# Altium PCB SirenControllerPCB.PcbDoc
Units mil, origin at the board's own origin, x right, y up, seen from the top; angles counter-clockwise.
Board outline 2760 x 2470 mil, 2 copper layers (Top Layer, Bottom Layer); 32 components, 19 nets, 145 pads, 17 vias.
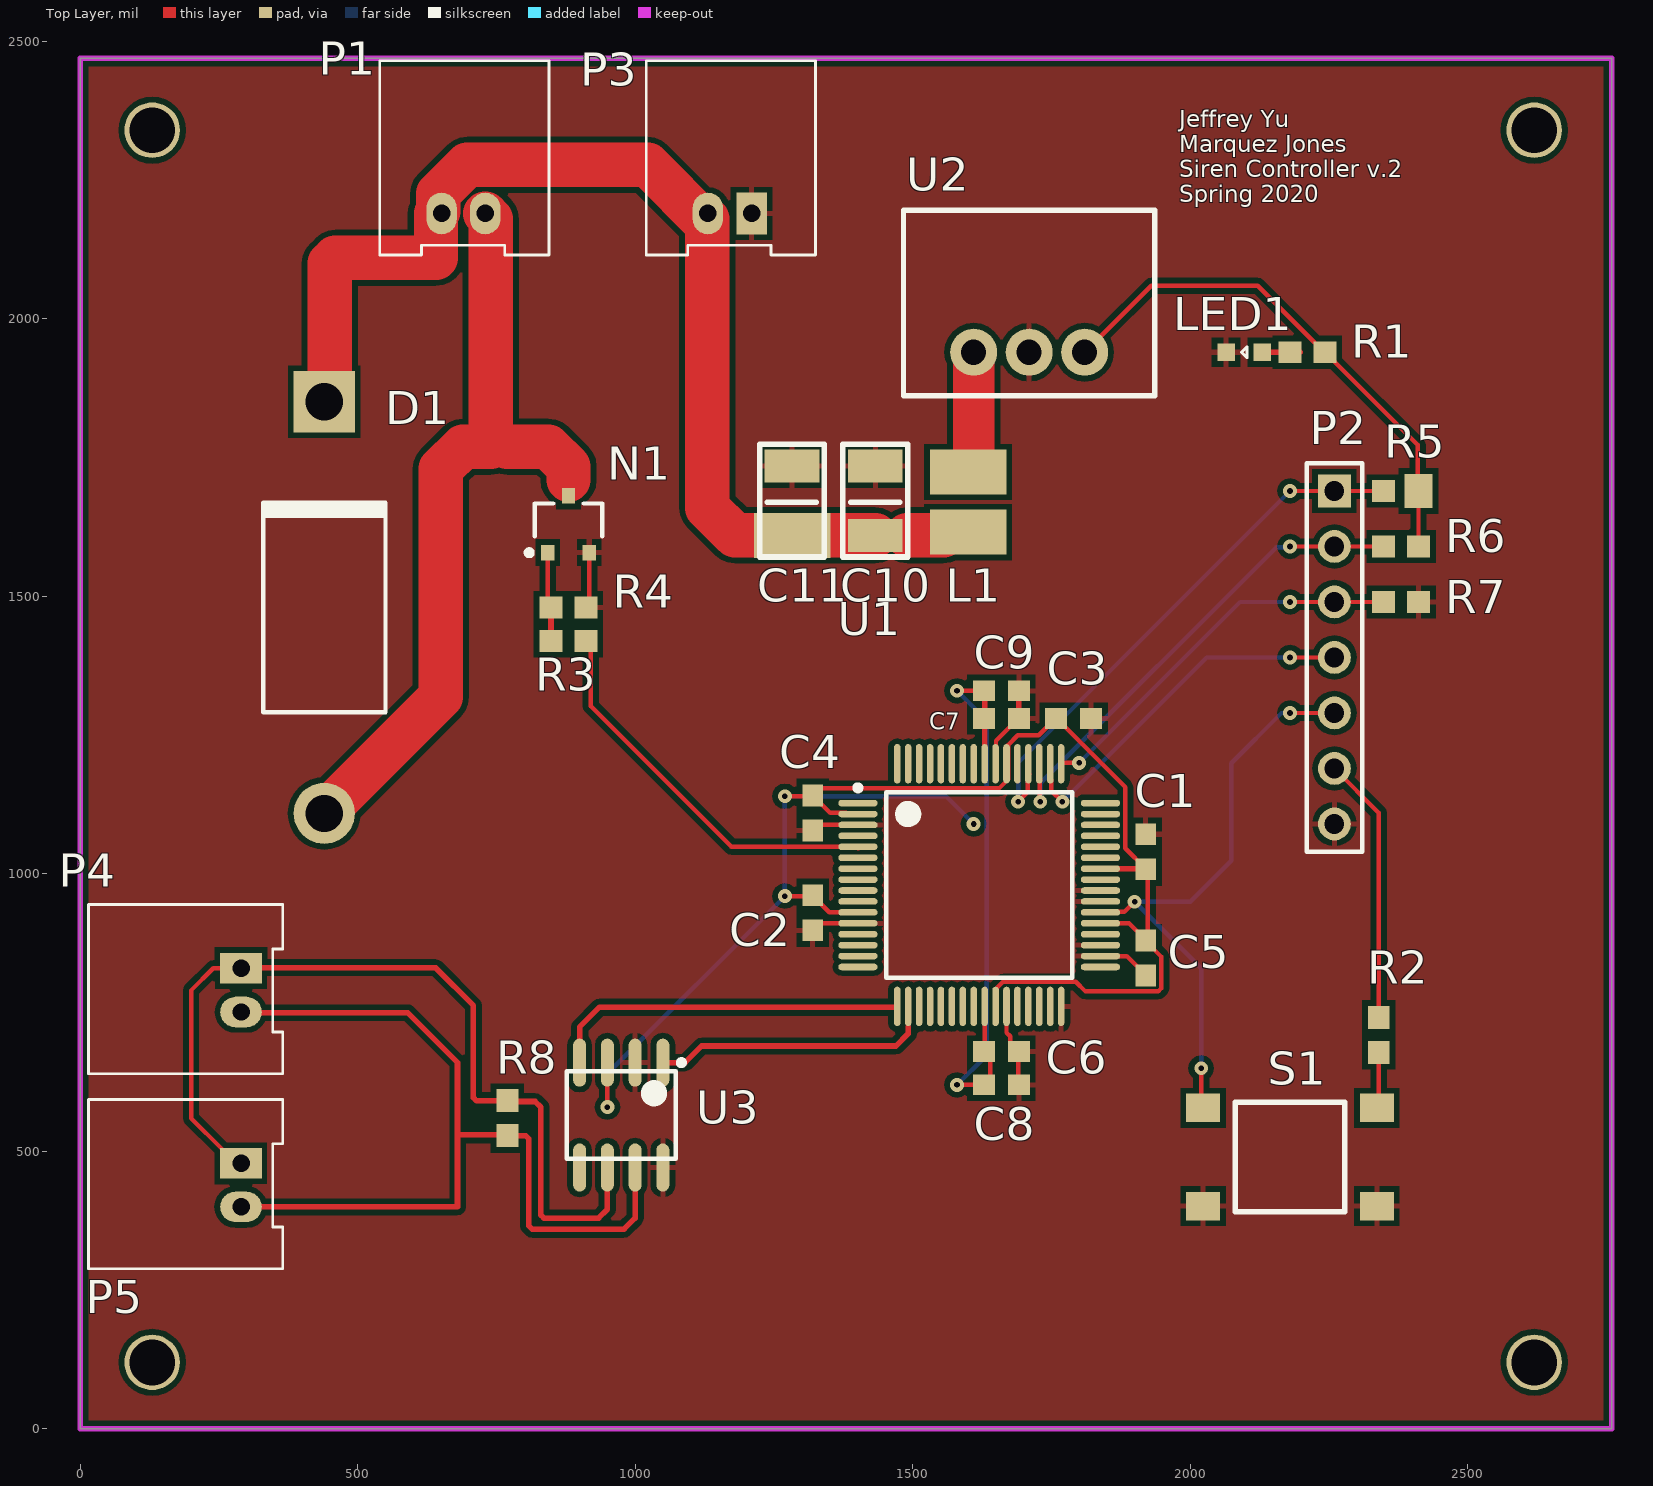
[diagram p0: Top Layer view]
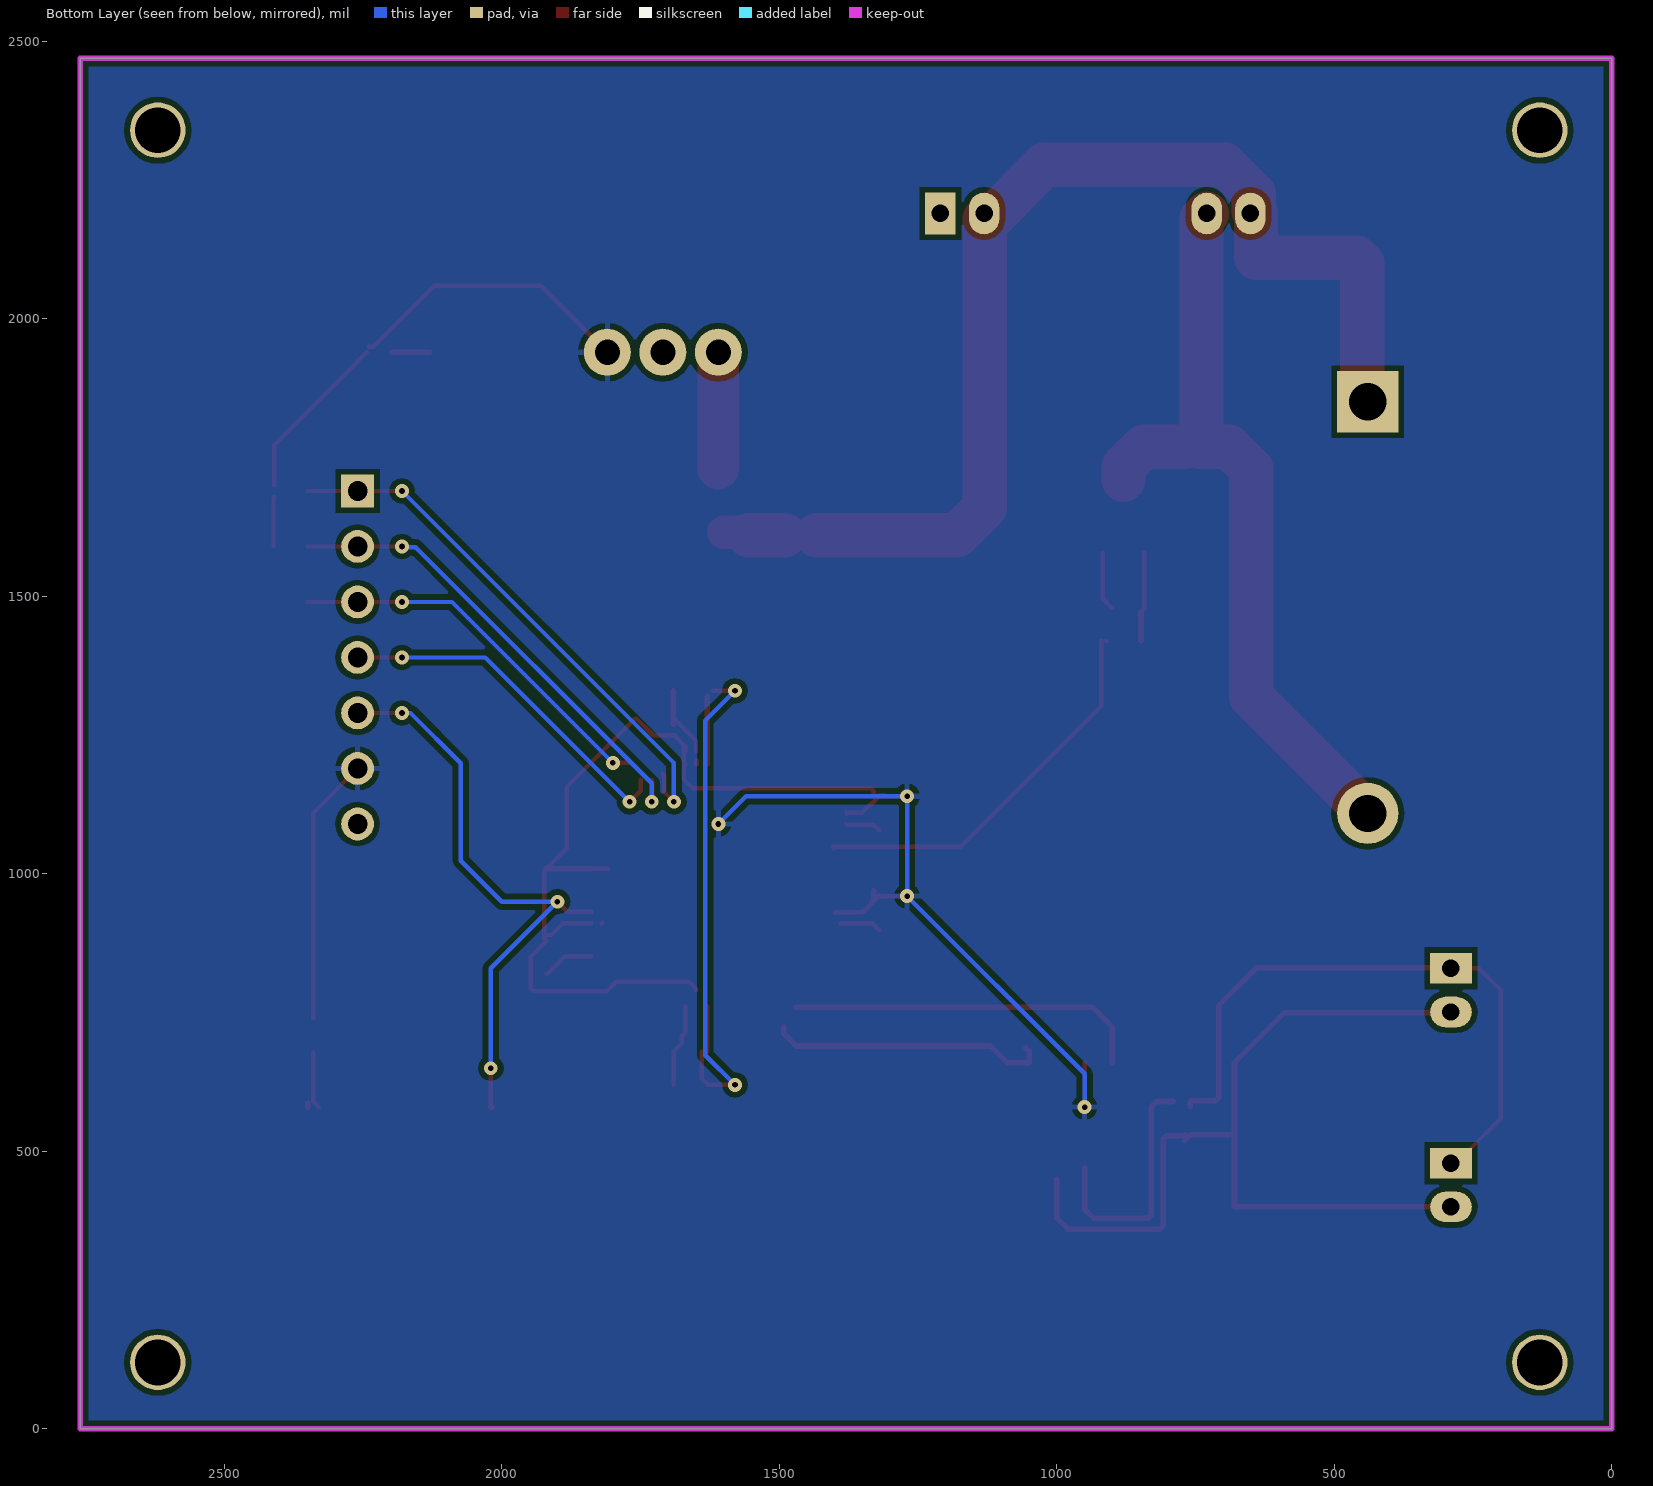
[diagram p1: Bottom Layer view, seen from below]

## Layer stack, top to bottom
Top Solder: solder mask 0.4, Solder Resist, Dk 3.5
Top Layer: signal copper 1.4
Dielectric 1: dielectric 12.6, FR-4, Dk 4.8
Bottom Layer: signal copper 1.4
Bottom Solder: solder mask 0.4, Solder Resist, Dk 3.5

## Board outline
0,0 0,2470 2760,2470 2760,0
cut-out: 2035,835

## Design rules (kind name [scope] priority, off if disabled: settings)
Clearance [All] p1: gap=10 ignorepadtopadclearanceinfootprint=FALSE except(0: Arc-Hole Track-Hole SMDPad-Hole THPad-Hole Via-Hole Fill-Hole Poly-Hole Region-Hole Text-Hole; 5: Track-Track Track-SMDPad SMDPad-SMDPad; 7: Track-Via)
HoleSize [All] p1: absolutevalues=TRUE maxlimit=150 minlimit=10 maxpercent=80.000 minpercent=20.000
MinimumAnnularRing [All] p1: minimumring=7
MinimumSolderMaskSliver [All] p1: minsoldermaskwidth=1
PolygonConnect [All] p1: connectstyle=Relief reliefconductorwidth=10 reliefentries=4 polygonreliefangle="90 Angle" airgapwidth=10
RoutingVias [All] p1: holewidth=10 width=22 viastyle="Through Hole" minholewidth=10 minwidth=22 maxholewidth=100 maxwidth=150
SilkToSolderMaskClearance [IsPad] p1: minsilkscreentomaskgap=5 clearancetoexposedcopper=TRUE
SolderMaskExpansion [All] p1: expansion=4
Width [All] p1: maxlimit=150 minlimit=8 preferedwidth=10
27 further rules are at their usual default settings.

## Classes and differential pairs
component class SirenSchematic: C1 C2 C3 C4 C5 C10 C11 D1 L1 LED1 N1 P2 P3 P4 P5 R1 R2 R3 R4 R5 R6 R7 R8 S1 U1 U2 U3

## Components (designator, comment, footprint, x,y, rotation, side; value= is the part's Value field where it differs from the comment)
C1 "Cap" CAPC0603 1920,1040 r90 top value=0.1uF
C2 "Cap" CAPC0603 1320,930 r270 top value=0.1uF
C3 "Cap" CAPC0603 1790,1280 r0 top value=0.1uF
C4 "Cap" CAPC0603 1320,1110 r270 top value=0.1uF
C5 "Cap" CAPC0603 1920,848.5 r270 top value=2.0uF
C6 "Cap" CAPC0603 1660,680 r0 top value=0.1uF
C7 "Cap" CAPC0603 1660,1280 r0 top value=0.1uF
C8 "Cap" CAPC0603 1660,620 r0 top value=1.0uF
C9 "Cap" CAPC0603 1660,1330 r0 top value=2.2uF
C10 "CAP1210" CAP1210#1 1432.76,1609.21 r270 top value=10uF
C11 "CAP1210" CAP1210#2 1282.76,1609.21 r270 top value=10uF
D1 "Diode 1N5400" DO-201AD 440,1480 r90 top
L1 "RLS-567" *IND_RLS-567 1600,1670 r90 top
LED1 "LED" LED0603 2097.52,1940 r180 top
N1 "SSM3K329R,LF" SSM3K329R,LF 880,1630 r90 top
P1 "2-pin Horz Sherlock" MOLEX-HDR-1X2-SHERLOCK-HORZ#1 730,2190 r0 top
P2 "Header 7" HDR1X7 2260,1690 r270 top
P3 "2-pin Horz Sherlock" MOLEX-HDR-1X2-SHERLOCK-HORZ#2 1210,2190 r0 top
P4 "2-pin Horz Sherlock" MOLEX-HDR-1X2-SHERLOCK-HORZ#2 290,830 r90 top
P5 "2-pin Horz Sherlock" MOLEX-HDR-1X2-SHERLOCK-HORZ#2 290,478.74 r90 top
R1 "Res" RES0603#1 2211.5,1940 r180 top value=1k
R2 "Res" RES0603#1 2340,710 r270 top value=10k
R3 "Res" RES0603#1 880,1420 r0 top value=100
R4 "Res" RES0603#1 880,1480 r0 top value=10k
R5 "Res" RES0603#2 2380,1690 r180 top value=10k
R6 "Res" RES0603#1 2380,1590 r180 top value=10k
R7 "Res" RES0603#1 2380,1490 r0 top value=10k
R8 "Res" RES0603#1 770,560 r270 top value=120
S1 "Button" PTS645xxxxSMTR92 2180,490 r0 top
U1 "TM4C123GH6PMT7R" PM0064A_N 1620,980 r0 top locked value=Value
U2 "R-78C3.3-1.0" R-78C3.3-1.0 1610,1940 r0 top
U3 "SN65HVD230DR" SOIC-8pin 975,565.51 r270 top

## Footprints (in the part's own frame and the unit in brackets; to place one, negate y for a bottom-side part, rotate by r counter-clockwise, add the part's x,y. Pads: shape width x height; smd on the part's side, far side on the other; paste and mask are expansions set on the pad)
*IND_RLS-567 [mm]
  rect 2.05x3.5 smd: 1(-1.375,0) 2(1.375,0)
CAP1210#1 [mm]
  rect 1.5x2.5 smd: 1(-0.02,0) 2(-3.2,0)
  silkscreen extent -4.2,-1.48 0.97,1.48, body extent -3.22,-1.25 0,1.26, height 2.5
CAP1210#2 [mm]
  rect 2.05x3.5 smd: 1(-0.02,0)
  rect 1.5x2.5 smd: 2(-3.2,0)
  silkscreen extent -4.2,-1.48 0.97,1.48, body extent -3.22,-1.25 0,1.26, height 2.5
CAPC0603 [mm] "Chip Capacitor, 2-Leads, Body 1.60x0.80mm, IPC Medium Density"
  rect 1x0.95 smd: 1(-0.8,0) 2(0.8,0)
  body extent -0.88,-0.48 0.87,0.48, height 0.8
DO-201AD [mm] "Diode, Axial; Body 9.5 x 5.6 mm (LxDia. max), Lead Dia. 1.32 mm (max)"
  round 2.8 hole 1.7: 1(-9.42,0)
  rect 2.8x2.8 hole 1.7: 2(9.42,0)
  silkscreen extent -4.8,-2.8 4.9,2.8
HDR1X7 [mm] "Connector; Header; 7 Position"
  rect 1.5x1.5 hole 0.9: 1(0,0)
  round 1.5 hole 0.9: 2(2.54,0) 3(5.08,0) 4(7.62,0) 5(10.16,0) 6(12.7,0) 7(15.24,0)
  silkscreen extent -1.27,-1.27 16.51,1.27
LED0603 [mm] "Chip LED, 2-Leads, Body 1.60x0.80mm, IPC Medium Density"
  rect 0.8x0.8 smd: A(-0.825,0) C(0.825,0)
  silkscreen extent -0.13,-0.25 0.12,0.25, body extent -0.88,-0.48 0.87,0.47, height 0.8
MOLEX-HDR-1X2-SHERLOCK-HORZ#1 [mm]
  oval 1.397x1.905 hole 0.8: 1(0,0) 2(-2,0)
  silkscreen extent -4.83,-1.91 2.92,6.98, body extent -4.83,-1.91 2.87,8.59, height 5.54
MOLEX-HDR-1X2-SHERLOCK-HORZ#2 [mm]
  rect 1.397x1.905 hole 0.8: 1(0,0)
  oval 1.397x1.905 hole 0.8: 2(-2,0)
  silkscreen extent -4.83,-1.91 2.92,6.98, body extent -4.83,-1.91 2.87,8.59, height 5.54
PM0064A_N [mm]
  oval 1.8x0.3 smd paste-0.102 mask+0.051: 1(-5.55,3.75) 2(-5.55,3.25) 3(-5.55,2.75) 4(-5.55,2.25) 5(-5.55,1.75) 6(-5.55,1.25) 7(-5.55,0.75) 8(-5.55,0.25) 9(-5.55,-0.25) 10(-5.55,-0.75) 11(-5.55,-1.25) 12(-5.55,-1.75) 13(-5.55,-2.25) 14(-5.55,-2.75) 15(-5.55,-3.25) 16(-5.55,-3.75) 33(5.55,-3.75) 34(5.55,-3.25) 35(5.55,-2.75) 36(5.55,-2.25) 37(5.55,-1.75) 38(5.55,-1.25) 39(5.55,-0.75) 40(5.55,-0.25) 41(5.55,0.25) 42(5.55,0.75) 43(5.55,1.25) 44(5.55,1.75) 45(5.55,2.25) 46(5.55,2.75) 47(5.55,3.25) 48(5.55,3.75)
  oval 0.3x1.8 smd paste-0.102 mask+0.051: 17(-3.75,-5.55) 18(-3.25,-5.55) 19(-2.75,-5.55) 20(-2.25,-5.55) 21(-1.75,-5.55) 22(-1.25,-5.55) 23(-0.75,-5.55) 24(-0.25,-5.55) 25(0.25,-5.55) 26(0.75,-5.55) 27(1.25,-5.55) 28(1.75,-5.55) 29(2.25,-5.55) 30(2.75,-5.55) 31(3.25,-5.55) 32(3.75,-5.55) 49(3.75,5.55) 50(3.25,5.55) 51(2.75,5.55) 52(2.25,5.55) 53(1.75,5.55) 54(1.25,5.55) 55(0.75,5.55) 56(0.25,5.55) 57(-0.25,5.55) 58(-0.75,5.55) 59(-1.25,5.55) 60(-1.75,5.55) 61(-2.25,5.55) 62(-2.75,5.55) 63(-3.25,5.55) 64(-3.75,5.55)
  silkscreen extent -5.67,-4.25 4.25,4.57, body extent -4.19,-4.19 4.19,4.19, height 0.64
PTS645xxxxSMTR92 [mm] "PTS645 Series SMT 6 mm Tactile Switch"
  rect 1.555x1.3 smd: A(-3.975,2.25) A(3.975,2.25) B(-3.975,-2.25) B(3.975,-2.25)
  silkscreen extent -2.5,-2.5 2.5,2.5, body extent -3,-3 3,3, height 4.5
R-78C3.3-1.0 [mm] "CONV DC/DC 1A 3.3V OUT SIP VERT"
  round 2.15 hole 1.15: 1(0,0) 2(2.54,0) 3(5.08,0)
  silkscreen extent -3.21,-2 8.29,6.5, body extent -3.3,-2.03 8.38,6.6, height 10.4
RES0603#1 [mm] "Chip Resistor, 2-Leads, Body 1.60x0.80mm, IPC Medium Density"
  rect 1.05x1 smd: 1(-0.8,0) 2(0.8,0)
  body extent -0.88,-0.48 0.87,0.47, height 0.8
RES0603#2 [mm] "Chip Resistor, 2-Leads, Body 1.60x0.80mm, IPC Medium Density"
  rect 1.3x1.555 smd: 1(-0.8,0)
  rect 1.05x1 smd: 2(0.8,0)
  body extent -0.88,-0.48 0.87,0.47, height 0.8
SOIC-8pin [mm] "For 296-1345-1-ND"
  oval 2.2x0.6 smd: 1(-2.4,1.905) 2(-2.4,0.635) 3(-2.4,-0.635) 4(-2.4,-1.905) 5(2.4,-1.905) 6(2.4,-0.635) 7(2.4,0.635) 8(2.4,1.905)
  silkscreen extent -2.52,-2.5 2,2.88, body extent -2,-2.5 2,2.5, height 1.75
SSM3K329R,LF [mm] "MOSFET N CH 30V 3.5A 2-3Z1A"
  rect 0.7x0.6 smd: 1(-1.3,0.95) 2(-1.3,-0.95) 3(1.3,0)
  silkscreen extent -1.42,-1.55 0.95,1.92, body extent -0.95,-1.55 0.95,1.55, height 0.8

## Part data
C1 C2 C3 C4 C5 C6 C7 C8 C9: Supplier Part Number 1=1276-1000-1-ND, Supplier 1=Digi-Key
C10 C11: "CAP CER 10UF 50V 20% X5R 1210", Supplier Part Number 1=587-2225-1-ND, Supplier 1=Digi-Key
D1: "3 Amp General Purpose Rectifier", ComponentLink1Description="Manufacturer Link", ComponentLink1URL=http://www.fairchildsemi.com/, ComponentLink2Description=Datasheet, ComponentLink2URL=http://www.fairchildsemi.com/ds/1N%2F1N5400.pdf, DatasheetVersion=1998, LatestRevisionDate=17-Jul-2002, LatestRevisionNote="Re-released for DXP Platform.", PackageDescription="Diode, Axial; Body 9.5 x 5.6 mm (LxDia. max), Lead Dia. 1.32 mm (max)", PackageReference=DO-201AD, PackageVersion=Aug-1999, Published=8-Jun-2000, Publisher="Altium Limited"
L1: "Inductor", Manufacturer_Name="RECOM Power", Mouser Part Number=919-RLS-567, Datasheet Link=https://componentsearchengine.com/Datasheets/1/RLS-567.pdf, Height=3.1mm, Manufacturer_Part_Number=RLS-567, Mouser Price/Stock=https://www.mouser.com/Search/Refine.aspx?Keyword=919-RLS-567
LED1: Color=Red, Supplier Part Number 1=754-1122-1-ND, Supplier 1=Digi-Key
N1: "MOSFET N CH 30V 3.5A 2-3Z1A", Manufacturer 1="Toshiba Semiconductor and Storage", Supplier Part Number 1=SSM3K329RLFTR-ND, Manufacturer Part Number 1=SSM3K329R,LF, Supplier 1=Digi-Key
P1 P3 P4 P5: library part MOLEX-HDR-1x2-SHERLOCK_RA, "Header, Molex, 2mm Pitch Sherlock Header, Single Row, Horizontal, 2 Circuits, Length 3.3mm,  0353630260", Manufacturer="Molex Inc", Manufacturer Part Number=0353630260, Supplier Part Number 1=WM18931-ND, Supplier 1=Digi-Key
P2: "Header, 7-Pin", LatestRevisionDate=17-Jul-2002, LatestRevisionNote="Re-released for DXP Platform.", Publisher="Altium Limited"
R1 R2 R3 R4 R5 R6 R7 R8: Supplier Part Number 1=RMCF0603JT10K0CT-ND, Supplier 1=Digi-Key
S1: "SPST Button", Supplier Part Number 1=CKN9087CT-ND, Supplier 1=Digi-Key
U1: "Imported", Alternate_PartNumber=TM4C123GH6PMT, Manufacturer="Texas Instruments", PartNumber=TM4C123GH6PMTR, CompType=IC, MountType=SMT, PackageReference=PM0064A, PIN_COUNT=64, RefDes=RefDes, RoHS=Y, TYPE=TYPE
U2: "CONV DC/DC 1A 3.3V OUT SIP VERT", Supplier Part Number 1=945-1394-5-ND, Supplier 1=Digi-Key
U3: "IC TXRX CAN 1MBPS 3.3V 8SOIC", Supplier Part Numbe 1=296-11654-1-ND, Supplier 1=Digi-Key

## Free pads (board coordinates)
  round 100 hole 82.68: 1(130,120) 1(130,2340) 1(2620,120) 1(2620,2340)

## Via types
v1: diameter 25, hole 10, Top Layer to Bottom Layer, tented both sides, 17 vias

## Nets (pads, with @x,y where several pads share a name; then routed paths per layer and width w, separated by ;. In a path a pad name is that pad's centre, name@x,y a point inside that pad or via, vN(x,y) a via of type N, cw(c..) or ccw(c..) an arc to the next point about the centre after c; other vN are vias at no path point)
24V: C10.1 C11.1 D1.2 L1.1 P1.2 P3.2 | length 2107.6
  Top Layer w8: P1.2 P1.2@651.26,2191.26 ; P3.2@1121.26,2180 1130,2171.26 P3.2@1131.26,2170 ; P3.2@1131.26,2200 P3.2@1140,2200 ; C10.1@1436.38,1606.38 C10.1@1445.87,1615.87
  Top Layer w10: D1.2@420,1870 D1.2@440,1850 ; 450,2100 460,2110 ; P3.2@1131.26,2180 P3.2
  Top Layer w60: L1.1@1555.6,1610 1561.47,1615.87 L1.1
  Top Layer w80: D1.2@450,1880 450,2100 ; 460,2110 641.26,2110 641.26,2190 645,2193.74 645,2225.21 697.29,2277.5 1022.5,2277.5 P3.2@1130,2170 ; P3.2@1130,2180 1130,2171.26 P3.2@1130,2170 ; C11.1 1180,1610 1130,1660 P3.2@1130,2170 ; C11.1@1290,1610 C10.1 ; 1490.27,1610 L1.1@1555.6,1610
CAN_RX: U1.17 U3.4 | length 644.9
  Top Layer w10: U3.4 900,724.14 935.86,760 ; 940,760 U1.17@1470,760
CAN_TX: U1.18 U3.1 | length 505.6
  Top Layer w10: U3.1@1056.29,686.5 1050,680.2 U3.1 1090,660 1120,690 1470,690 1492.05,712.05 1492.05,724.93
CANH: P4.2 P5.2 R8.2 U3.7 | length 1643.5
  Top Layer w10: P5.2 680,400 680,530 ; P4.2@290,750 590,750 680,660 680,530 ; R8.2@770,520 760,530 680,530 ; R8.2 R8.2@771.5,528.5 ; R8.2@770,530 R8.2@771.5,528.5 ; U3.7@1000,450 1000,380 980,360 814.36,360 808.5,365.86 808.5,522.65 802.65,528.5 R8.2@771.5,528.5
CANL: P4.1 P5.1 R8.1 U3.6 | length 1573.7
  Top Layer w8: P5.1@280,480 278.74,480 256.5,502.24 256.5,503.5 200,560 200,790 240,830 P4.1 ; P5.1@280,490 P5.1@290,480
  Top Layer w10: P4.1@300,830 300.81,830.81 640.81,830.81 708.74,762.88 708.74,597.12 714.6,591.26 758.74,591.26 760,590 R8.1@760,580.51 ; 790,590 820,590 830,580 830,385.86 835.86,380 934.14,380 950,395.86 U3.6
GND: C1.2 C2.2 C3.2 C4.2 C5.2 C6.2 C7.2 C8.2 C9.2 C10.2 C11.2 LED1.C N1.2 P2.7 P3.1 R4.2 R7.2 S1.B U1.3 U1.12 U1.27 U1.32 U1.34 U1.35 U1.39 U1.40 U1.55 U2.2 U3.2 U3.8 | length 641.7
  Top Layer w8: R4.2@900,1480 901.72,1480 917.4,1495.69 N1.2 ; C2.2 1332.6,911.1 1388.9,911.1 U1.12@1390,910 ; C4.2 1329.76,1088.27 1378.27,1088.27 U1.3@1380,1090 ; U1.55@1650,1220 1650.26,1220.26 1650.26,1239.75 1690.51,1280 C7.2 ; U1.27 1669.21,714.06 1675.81,707.46 1675.81,694.7 1690.51,680 C6.2 1690,678.5 C8.2@1690,620 ; U1.34 1885.94,852.05 1917.99,820 C5.2@1920,820
  Top Layer w10: U1.55 U1.55@1649.53,1199.53 ; U1.55@1649.53,1202.04 U1.55@1649.53,1199.53 ; U1.55@1649.84,1203.48 1649.84,1199.84 U1.55@1649.53,1199.53 ; C7.2@1690,1270 C7.2@1691.5,1271.5 ; C7.2@1691.5,1270 C7.2@1691.5,1271.5 ; C9.2 C7.2 C7.2@1691.5,1271.5
NetC11_1: L1.2 U2.1 | length 224.1
  Top Layer w8: L1.2@1600,1720 L1.2@1610,1730
  Top Layer w75: L1.2@1610,1730 U2.1
NetD1_1: D1.1 N1.3 P1.1 | length 1397.3
  Top Layer w8: P1.1 P1.1@730,2200
  Top Layer w80: D1.1 650,1319.13 650,1730 690,1770 740,1770 740,2180 P1.1 ; 770,1770 843.73,1770 880,1733.73 880,1710
NetLED1_A: LED1.A R1.2 | length 68.5
  Top Layer w10: LED1.A R1.2@2198.5,1940
NetN1_1: N1.1 R3.1 R4.1 | length 163.4
  Top Layer w8: N1.1 842.6,1477.4 848.5,1471.5 R4.1@850,1470
  Top Layer w10: R3.1 R4.1@848.5,1471.5
RST_N: P2.5 R2.2 S1.A U1.38 | length 1205.3
  Top Layer w8: U1.38 1839.23,931.52 1881.52,931.52 v1(1900,950) ; S1.A@2020,580 v1(2020,650) ; v1(2180,1290) P2.5 ; S1.A@2330,580 2340,590 R2.2
  Top Layer w10: S1.A@2017.07,580 S1.A@2020,580 ; S1.A@2350,580 S1.A@2350,587.07
  Bottom Layer w8: v1(2020,650) 2020,830 v1(1900,950) 2000,950 2073.97,1023.97 2073.97,1199.28 2164.69,1290 v1(2180,1290)
SirenPWM: R3.2 U1.5 | length 708.1
  Top Layer w8: R3.2@910,1420 R3.2 R3.2@912.48,1420 ; R3.2@920,1420 920,1302.48 1173.58,1048.9 U1.5
  Top Layer w10: U1.5 1402.32,1048.07 U1.5@1402.32,1047.68
TCK/SWCLK: 
TCK_SWCLK: P2.1 R5.2 U1.52 | length 991.2
  Top Layer w8: v1(1690,1130) 1707.85,1147.85 1707.85,1177.85 U1.52@1710,1180 ; v1(2180,1690) P2.1 R5.2 R5.2@2350,1690
  Bottom Layer w8: v1(1690,1130) 1690,1200 v1(2180,1690)
TDI: P2.4 U1.50 | length 646
  Top Layer w8: U1.50@1750,1170 1750,1150 v1(1770,1130) ; v1(2180,1390) P2.4
  Bottom Layer w8: v1(1770,1130) 2030,1390 v1(2180,1390)
TDO/SWO: P2.3 R7.1 U1.49 | length 690.1
  Top Layer w8: U1.49@1770,1200 v1(1800,1200) ; v1@2190,1490 P2.3 R7.1 R7.1@2350,1490
  Bottom Layer w8: v1(1800,1200) 2090,1490 v1(2180,1490)
TMS/SWDIO: P2.2 R6.2 U1.51 | length 870.8
  Top Layer w8: v1(1730,1130) 1729,1131 1729,1169 U1.51@1730,1170 ; v1(2180,1590) P2.2 R6.2 R6.2@2350,1590
  Bottom Layer w8: v1(1730,1130) 1730,1163.23 2155.5,1588.73 2178.73,1588.73 v1(2180,1590)
VDD: C1.1 C2.1 C3.1 C4.1 C5.1 P2.6 R1.1 R2.1 R5.1 R6.1 U1.2 U1.11 U1.26 U1.37 U1.42 U1.54 U2.3 U3.3 | length 4473.8
  Top Layer w8: v1(950,580) U3.3 ; v1(1270,960) C2.1@1320,960 ; v1(1270,1140) C4.1@1320,1140 ; C4.1@1310,1141.5 C4.1 1320,1140.51 1334.7,1125.81 1335.69,1125.81 1351.5,1110 1380,1110 U1.2@1378.5,1108.5 ; C2.1 1320,960.51 1349.72,930.79 1399.21,930.79 U1.11@1400,930 ; C4.1@1330,1140 1330,1149.37 1334.7,1154.07 1655.7,1154.07 1672.62,1170.99 U1.54@1672.62,1232.83 ; U1.26@1650,790 1650.26,790.26 1650.26,793.15 1663.04,805.93 1793.93,805.93 1811.54,788.32 1942.43,788.32 1947.7,793.59 1947.7,851.31 1920,879.02 C5.1 1923.5,883.5 1923.5,1005 C1.1 1920,1009.49 1919.74,1009.74 1882.94,1046.55 1882.94,1156.55 1760,1279.49 C3.1@1760,1280 ; U1.54@1668.48,1197.77 U1.54 ; U1.54@1670,1220 1669.94,1220.06 1669.94,1230.16 U1.54@1672.62,1232.83 ; C3.1 1757.52,1280 1727.27,1249.75 1689.54,1249.75 U1.54@1672.62,1232.83 ; U1.42@1807.95,1009.53 U1.42 ; U2.3 1930,2060 2122.01,2060 2232.01,1950 R1.1@2240,1950 ; U1.37@1818.9,911.1 U1.37@1820,910 ; U1.37 1889.88,911.1 1910.98,890 C5.1@1920,890 ; R1.1 2243.98,1940 2259.66,1924.31 2259.66,1923.33 2410,1772.99 R5.1@2410,1700 ; P2.6 2340,1110 R2.1 R2.1@2340,740 ; R5.1@2410,1680 2411.5,1678.5 R6.1
  Top Layer w10: C2.1@1330,970 1330,952.58 C2.1@1333.7,948.88 ; U1.42 1919.53,1009.53 1919.74,1009.74 C1.1@1920,1010
  Bottom Layer w8: v1(950,580) 950,640 v1(1270,960) v1(1270,1140) 1560,1140 v1(1610,1090)
VDDC: C6.1 C7.1 C8.1 C9.1 U1.25 U1.56 | length 1120.7
  Top Layer w8: v1(1580,620) C8.1 1640,631.5 C6.1@1640,680 ; v1(1580,1330) C9.1@1620,1330 ; U1.25 1629.84,680.16 C6.1@1630,680
  Top Layer w10: U1.56 1629.84,1299.84 1630,1300 ; C7.1@1630,1290 1630,1300 ; C9.1@1630,1320 1630,1300
  Bottom Layer w8: v1(1580,620) 1633.5,673.5 1633.5,1276.5 v1(1580,1330)
pads on no net: U1.1 U1.4 U1.6 U1.7 U1.8 U1.9 U1.10 U1.13 U1.14 U1.15 U1.16 U1.19 U1.20 U1.21 U1.22 U1.23 U1.24 U1.28 U1.29 U1.30 U1.31 U1.33 U1.36 U1.41 U1.43 U1.44 U1.45 U1.46 U1.47 U1.48 U1.53 U1.57 U1.58 U1.59 U1.60 U1.61 U1.62 U1.63 U1.64 U3.5

## Polygon pours and split planes (outlines as drawn)
VDD on Bottom Layer "Bottom Layer-VDD" (solid, pour order 20): 0,2470 0,0 2760,0 2760,2470
GND on Top Layer "Top Layer-GND" (solid, pour order 18): 0,2470 0,0 2760,0 2760,2470

## Keep-outs
Keep-Out Layer:
  the board outline again, w10

## Silkscreen, mask and mechanical layers (free items; w line width, h text height)
Top Overlay:
  text "Jeffrey Yu / Marquez Jones / Siren Controller v.2 / Spring 2020" at 1980,2210 h30